# EAGLE board 7seg (EAGLE 6.5.0)
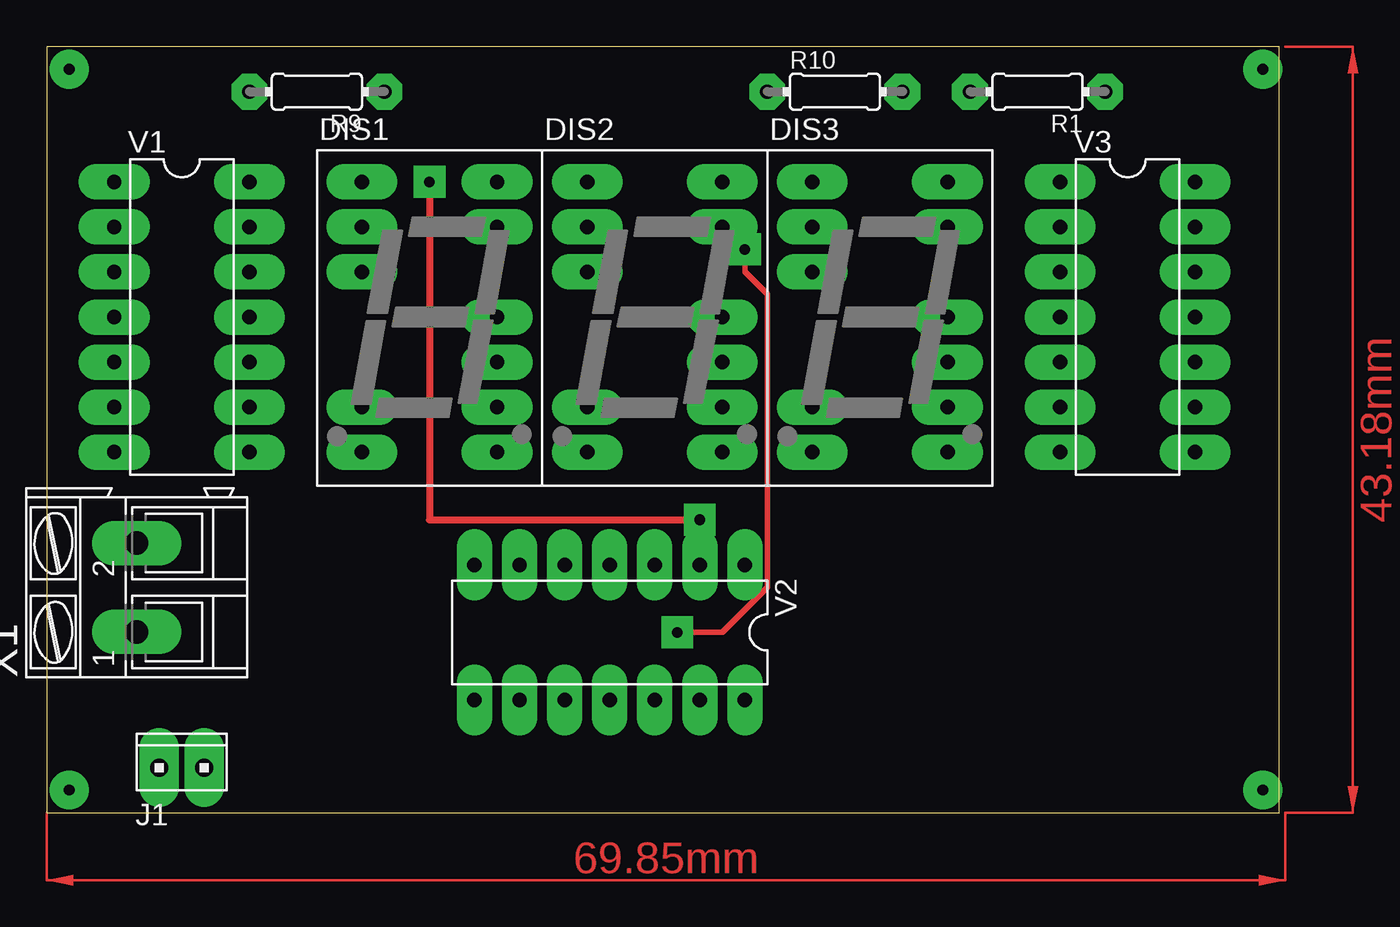
[diagram p0: board, top side]
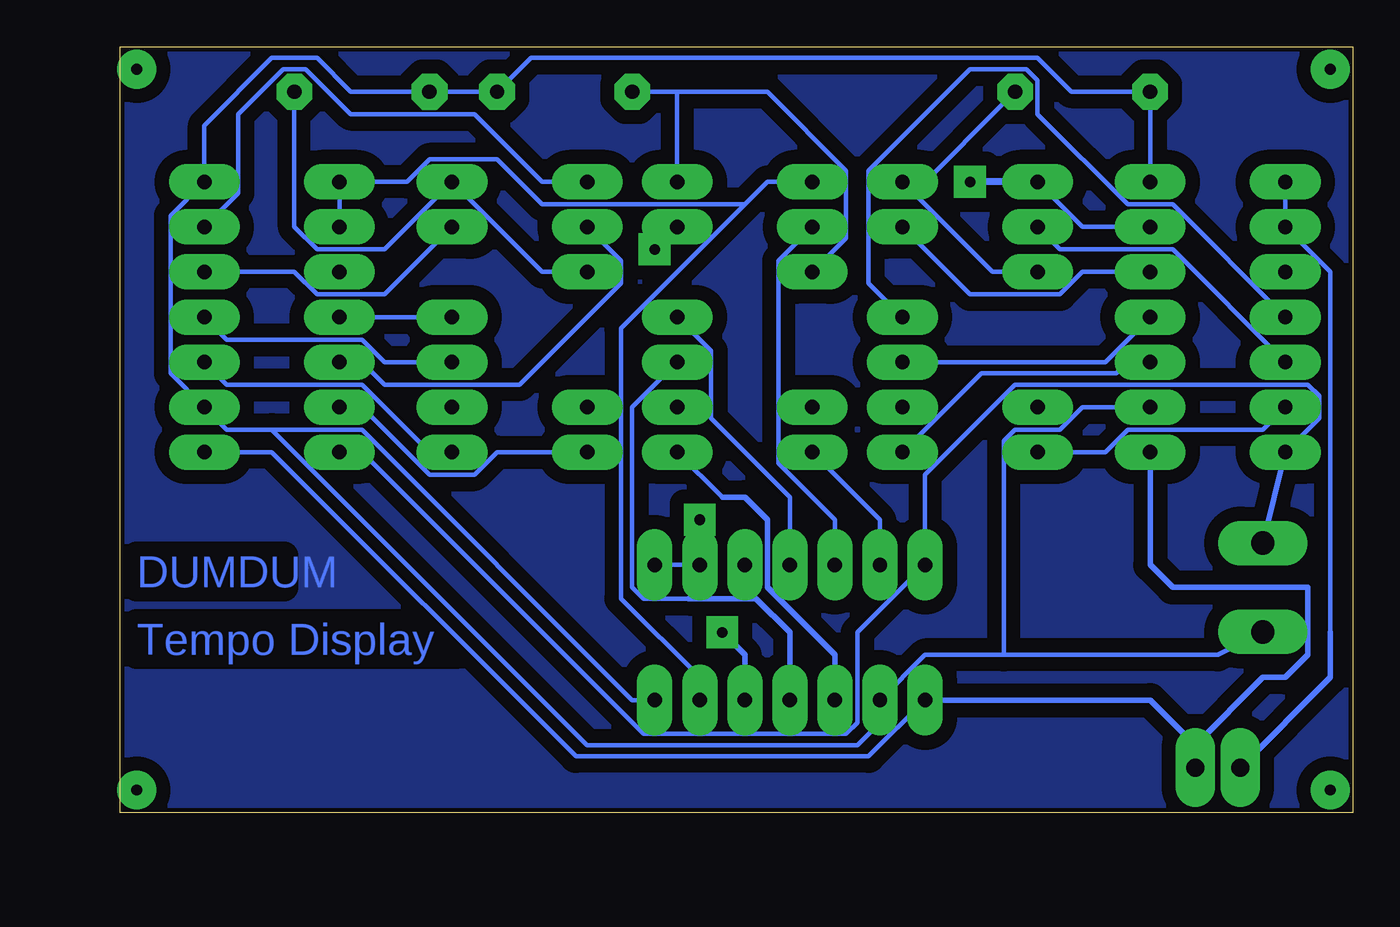
[diagram p1: board, bottom side, seen from below]

Size 69.52 x 43.17 mm. Coordinates in mm from the lower left corner, seen from the top.
Outline: 0,0 69.52,0 69.52,43.17 0,43.17 0,0
Copper layers (1*16): Top 0.035mm / dielectric 1.5mm / Bottom 0.035mm
Design rules "hobby-desingrules": minimum track width 0.8mm, minimum drill 0.8mm, track to track 0.8mm, track to pad 0.8mm, pad to pad 0.45mm, via to via 0.8mm, smd to smd 8mil, copper to edge 10mil, drill to drill 8mil, minimum pad ring 0.6mm, minimum via ring 0.6mm, stop-mask expansion 0mil, vias tented up to drill 0mil, thermal gap 10mil

## Footprints (pad centres in the part's own frame; a part is rotated, then mirrored left to right if it is on the bottom)
HDSP-I = drill 0.813 long: 1 -3.81,7.62; 2 -3.81,5.08; 3 -3.81,2.54; 6 -3.81,-5.08; 7 -3.81,-7.62; 8 3.81,-7.62; 9 3.81,-5.08; 10 3.81,-2.54; 11 3.81,0; 13 3.81,5.08; 14 3.81,7.62
10X02MTA = drill 1.016 long: 1 1.27,0; 2 -1.27,0
0204/7 = drill 0.813 octagon: 1 -3.81,0; 2 3.81,0
DIL14 = drill 0.813 long: 1 -7.62,-3.81; 2 -5.08,-3.81; 3 -2.54,-3.81; 4 0,-3.81; 5 2.54,-3.81; 6 5.08,-3.81; 7 7.62,-3.81; 8 7.62,3.81; 9 5.08,3.81; 10 2.54,3.81; 11 0,3.81; 12 -2.54,3.81; 13 -5.08,3.81; 14 -7.62,3.81
AK300/2 = drill 1.321 long: 1 -2.515,0; 2 2.489,0

## Placement (x,y rotation side)
DIS1  HD-E100  [HDSP-I]  21.59,27.94 0 top
DIS2  HD-E100  [HDSP-I]  34.29,27.94 0 top
DIS3  HD-E100  [HDSP-I]  46.99,27.94 0 top
J1  [10X02MTA]  7.62,2.54 0 top
R1  100  [0204/7]  55.88,40.64 180 top
R9  100  [0204/7]  15.24,40.64 180 top
R10  100  [0204/7]  44.45,40.64 0 top
V1  74164N  [DIL14]  7.62,27.94 270 top
V2  74164N  [DIL14]  31.75,10.16 180 top
V3  74164N  [DIL14]  60.96,27.94 270 top
X1  [AK300/2]  5.08,12.7 90 top

## Library data of the parts
DIS1-DIS3 = display-hp; OC_FARNELL: unknown; OC_NEWARK: unknown
J1 = con-amp
R1 R9 R10 = resistor
V1-V3 = 74ttl-din
X1 = con-ptr500; OC_FARNELL: unknown; OC_NEWARK: unknown

## Nets
+5V: R1.2 R9.2 R10.2 V1.9 V1.14 V2.9 V2.14 V3.9 V3.14 X1.1
CLOCK_PIN_164: J1.1 V1.8 V2.8 V3.8
DATA_PIN_164: J1.2 V1.1 V1.2
GND: V1.7 V2.7 V3.7 X1.2
N$1: DIS2.1 V2.13 V3.1 V3.2
N$2: DIS1.11 V1.4
N$3: DIS1.2 V1.5
N$4: DIS1.7 V1.6
N$5: DIS1.8 V1.10
N$6: DIS1.10 V1.11
N$7: DIS1.13 V1.12
N$8: DIS3.11 V3.4
N$9: DIS1.1 V1.13 V2.1 V2.2
N$10: DIS2.11 V2.4
N$11: DIS2.2 V2.5
N$12: DIS2.7 V2.6
N$13: DIS2.8 V2.10
N$14: DIS2.10 V2.11
N$15: DIS2.13 V2.12
N$16: DIS1.3 DIS1.14 R9.1
N$17: DIS3.2 V3.5
N$18: DIS3.7 V3.6
N$19: DIS3.8 V3.10
N$20: DIS3.10 V3.11
N$21: DIS3.13 V3.12
N$22: DIS3.1 V3.13
N$23: DIS2.3 DIS2.14 R10.1
N$24: DIS3.3 DIS3.14 R1.1

## Tracks (layer width: path | path; a pad name or v marks a point on that pad's centre or on a via)
+5V
  Bottom 0.254: 19.68,8.89 7.62,8.89 X1.1 | 19.68,8.89 24.13,8.89 V2.9 26.67,5.08 27.94,3.81 43.18,3.81 60.96,21.59 | V1.9 15.24,22.86 16.51,21.59 19.05,21.59 19.68,20.95 19.68,8.89 | V1.14 R9.2 15.88,40.64 17.78,42.55 46.35,42.55 R10.2 R1.2 56.52,40.64 58.42,42.55 60.96,42.55 64.77,38.73 V3.14 66.67,33.66 66.67,24.77 V3.9 63.5,21.59 60.96,21.59 | V2.14 40.64,6.35 55.88,21.59 60.96,21.59
CLOCK_PIN_164
  Bottom 0.254: V3.8 60.96,20.32 43.81,3.17 27.3,3.17 V2.8
  Bottom 0.305: V1.8 11.43,13.97 10.16,12.7 2.54,12.7 2.54,8.89 3.81,7.62 5.08,7.62 8.89,3.81 | 8.89,3.81 J1.1 | V2.8 11.43,6.35 8.89,3.81
DATA_PIN_164
  Bottom 0.254: V1.1 V1.2 1.27,30.48 1.27,10.16
  Bottom 0.305: 1.27,10.16 1.27,7.62 J1.2
GND
  Bottom 0.254: V1.7 1.91,22.23 1.91,23.5 2.54,24.13 19.05,24.13 24.13,19.05 V2.7 27.94,10.16 27.94,5.08 28.57,4.45 40.01,4.45 55.88,20.32 V3.7
  Bottom 0.305: V1.7 X1.2
N$1
  Bottom 0.254: V3.2 V3.1 53.34,35.56 52.07,36.83 48.26,36.83 45.72,34.29 34.29,34.29 | V2.13 36.83,7.62 41.27,12.06 41.27,27.3 34.29,34.29 | 34.29,34.29 33.02,35.56 DIS2.1
N$2
  Bottom 0.254: V1.4 10.16,34.29 12.7,34.29 17.78,39.37 17.78,41.27 18.41,41.91 21.59,41.91 27.3,36.2 27.3,29.84 DIS1.11
N$3
  Bottom 0.254: V1.5 10.16,31.75 16.51,31.75 DIS1.2
N$4
  Bottom 0.254: DIS1.7 13.97,20.32 12.7,21.59 5.08,21.59 V1.6
N$5
  Bottom 0.254: V1.10 12.7,25.4 13.34,24.77 20.95,24.77 DIS1.8
N$6
  Bottom 0.254: DIS1.10 13.97,25.4 V1.11
N$7
  Bottom 0.254: V1.12 15.24,30.48 16.51,29.21 21.59,29.21 DIS1.13
N$8
  Bottom 0.254: V3.4 DIS3.11
N$9  (via drill 0.6 pad 1.78)
  Top 0.406: v21.59,35.56 21.59,16.51 v36.83,16.51
  Bottom 0.254: V1.13 15.24,33.02 DIS1.1 | V2.1 V2.2
  Bottom 0.406: DIS1.1 v21.59,35.56 | v36.83,16.51 V2.2
N$10
  Bottom 0.254: V2.4 31.75,17.78 36.2,22.23 36.2,26.04 DIS2.11
N$11
  Bottom 0.254: V2.5 29.21,16.51 32.38,19.68 32.38,31.11 DIS2.2
N$12
  Bottom 0.254: V2.6 26.67,16.51 DIS2.7
N$13
  Bottom 0.254: DIS2.8 35.56,17.78
  Bottom 0.305: 35.56,17.78 34.29,17.78 33.02,16.51 33.02,12.7 29.21,8.89 V2.10
N$14
  Bottom 0.254: 37.47,12.06 40.01,12.06 40.64,12.7 40.64,22.86 DIS2.10
  Bottom 0.305: 37.47,12.06 33.66,12.06 31.75,10.16 V2.11
N$15  (via drill 0.6 pad 1.78)
  Top 0.305: v39.37,31.75 39.37,30.48 40.64,29.21 40.64,12.7 38.1,10.16 v35.56,10.16
  Bottom 0.305: V2.12 34.29,8.89 v35.56,10.16 | v39.37,31.75 DIS2.13
N$16
  Bottom 0.254: DIS1.3 20.32,30.48 24.77,34.92 | 24.77,34.92 R9.1 | 24.77,34.92 DIS1.14
N$17
  Bottom 0.254: V3.5 55.88,25.4 54.61,24.13 46.99,24.13 41.27,29.84 41.27,31.11 DIS3.2
N$18
  Bottom 0.254: DIS3.7 48.26,20.32 49.53,19.05 52.07,19.05 55.88,22.86 V3.6
N$19
  Bottom 0.254: DIS3.8 52.07,20.32 55.88,24.13 63.5,24.13 V3.10
N$20
  Bottom 0.254: DIS3.10 54.61,25.4 55.88,26.67 63.5,26.67 V3.11
N$21
  Bottom 0.254: V3.12 59.69,30.48 58.42,29.21 54.61,29.21 DIS3.13
N$22
  Bottom 0.254: DIS3.1 45.72,35.56 49.53,39.37 56.52,39.37 59.05,41.91 60.33,41.91 62.87,39.37 62.87,34.92 V3.13
N$23
  Bottom 0.254: DIS2.3 28.57,32.38 28.57,36.2 33.02,40.64 38.1,40.64 | R10.1 38.1,40.64 | 38.1,40.64 DIS2.14
N$24
  Bottom 0.254: DIS3.3 45.72,30.48 DIS3.14 54.61,31.75 58.42,31.75 59.69,33.02 R1.1
N$25  (via drill 0.6 pad 2.18)
  other vias: 1.27,41.91
N$26  (via drill 0.6 pad 2.18)
  other vias: 68.58,41.91
N$27  (via drill 0.6 pad 2.18)
  other vias: 68.58,1.27
N$28  (via drill 0.6 pad 2.18)
  other vias: 1.27,1.27
N$29
  pour Bottom: 0,43.18 0,0 69.85,0 69.85,43.18
(copper drawn outside any net)
  shapes: Top area x2

## Text on the board
Bottom: DUMDUM | Tempo Display